# Allegro board dsb-p2.brd
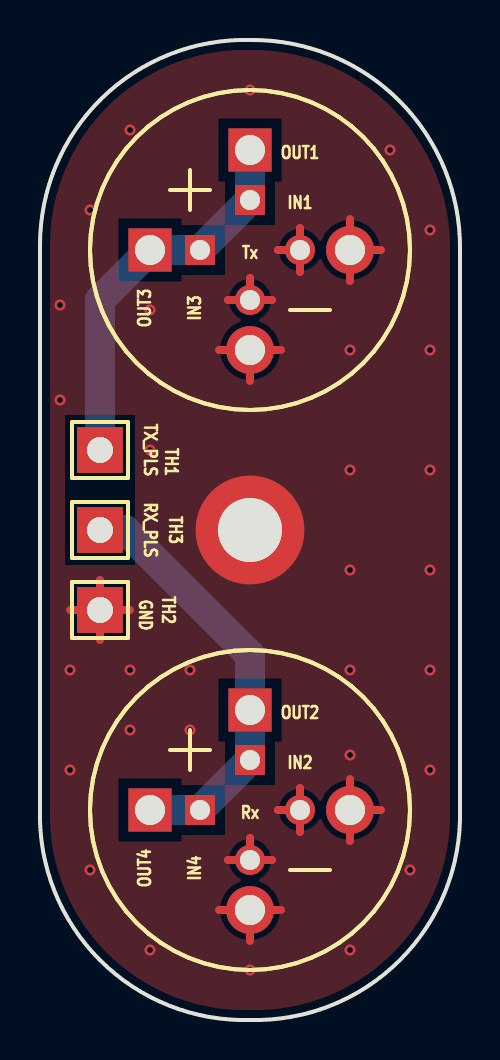
[diagram p0: board, top side]
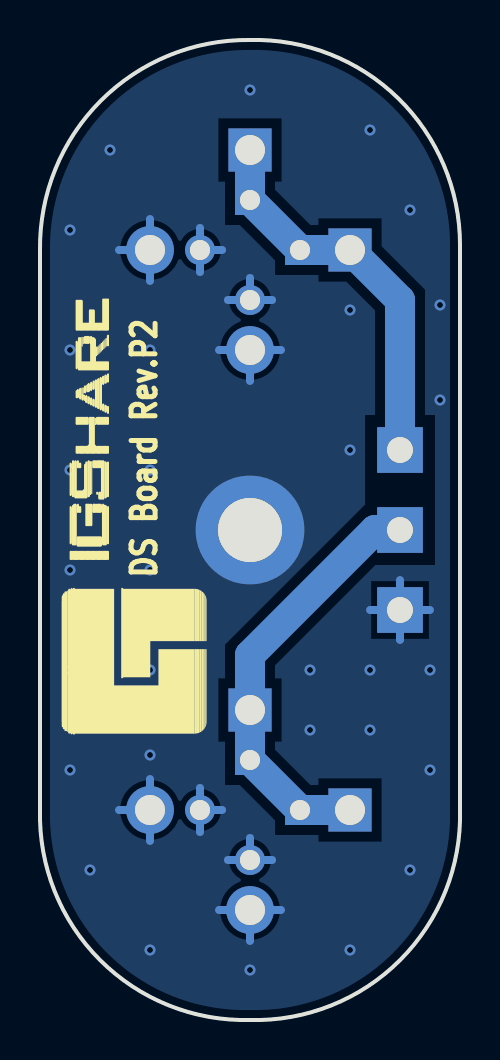
[diagram p1: board, bottom side, seen from below]

Outline 21 x 49 mm; copper layers: TOP, BOTTOM. Coordinates in mm from the lower left corner of the outline.
Outline path: 0,38.75 0,10.5 arc(3,3) 10.5,0 arc(18,3) 21,10.5 21,38.5 arc(17.96,45.96) 10.5,49 arc(3.09,46.09) 0,38.75

## Placement (name value [footprint] x y rotation side)
A  -  []  24.25 32.25 90 bottom
H1  -  [HOLE3_2]  10.5 24.5 0 top
NOREF  -  []  1 1 0 top
NOREF#2  -  []  28 7.5 0 top
NOREF#3  -  []  26.5 30.25 0 top
O1  -  [ZT40_ZR40]  10.5 38.5 270 top
O2  -  [ZT40_ZR40]  10.5 10.5 270 top
O3  -  [ZT40_ZR40]  10.5 38.5 0 top
O4  -  [ZT40_ZR40]  10.5 10.5 0 top
TH1  -  [TP0_9]  3 28.5 0 top
TH2  -  [TP0_9]  3 20.5 0 top
TH3  -  [TP0_9]  3 24.5 0 top
W1  -  [US14_4_01A]  10.5 38.5 270 top
W2  -  [US14_4_01A]  10.5 10.5 270 top
W3  -  [US14_4_01A]  10.5 38.5 0 top
W4  -  [US14_4_01A]  10.5 10.5 0 top

## Library data of the parts
H1 = PCB_HOLE: alternate symbols: (B:HOLE3_2_ALT)
O1 O3 = ZT40: alternate symbols: (B:ZT40_ZR40_ALT)
O2 O4 = ZR40R: alternate symbols: (B:ZT40_ZR40_ALT)
TH1-TH3 = B+: alternate symbols: (B:TP0_9_ALT)
W1-W4 = US14_4_01A: alternate symbols: (B:US14_4_01A_ALT)

## Footprints (pads in the part's own frame, mm; a bottom-side part is the same pattern mirrored in y, then rotated)
HOLE3_2
  round 5.436 hole 3.2: 1(0,0)
TP0_9
  rect 2.286x2.286 hole 1.295: 1(0,0)
US14_4_01A
  rect 1.499x1.499 hole 1: 1(-2.5,0)
  round 1.499 hole 1: 2(2.5,0)
ZT40_ZR40
  rect 2.159x2.159 hole 1.499: 1(-5,0)
  round 2.388 hole 1.5: 2(5,0)

## Nets
GND: H1.1 O1.2 O2.2 O3.2 O4.2 TH2.1 W1.2 W2.2 W3.2 W4.2
RX_PLS: O2.1 O4.1 TH3.1 W2.1 W4.1
TX_PLS: O1.1 O3.1 TH1.1 W1.1 W3.1

## Via types
v1: diameter 0.55, hole 0.3, TOP to BOTTOM, 30 vias

## Routing (per net, layer and track width the routed paths; a pad name or vN(x,y) marks a point on that pad's centre or on a via; arc(x,y) is an arc through that point)
GND: length 75.4
  TOP w0.4: 13,9.4 W4.2 ; W4.2 11.9,10.5 ; W4.2 13,11.6 ; W3.2 13,39.6 ; W3.2 11.9,38.5 ; W3.2 13,37.4 ; TH2.1 3,21.99 ; TH2.1 3,19.01 ; TH2.1 1.51,20.5 ; TH2.1 4.49,20.5 ; 10.5,3.96 O2.2 ; O2.2 12.04,5.5 ; O2.2 8.96,5.5 ; 10.5,31.96 O1.2 ; O1.2 8.96,33.5 ; O1.2 12.04,33.5 ; O4.2 17.04,10.5 ; O4.2 15.5,8.96 ; O4.2 15.5,12.04 ; O3.2 17.04,38.5 ; O3.2 15.5,36.96 ; O3.2 15.5,40.04 ; 9.4,36 W1.2 ; W1.2 10.5,37.1 ; W1.2 11.6,36 ; W2.2 10.5,9.1 ; W2.2 9.4,8 ; W2.2 11.6,8
  BOTTOM w0.4: 15.5,36.96 O3.2 ; O3.2 17.04,38.5 ; O3.2 15.5,40.04 ; 11.9,38.5 W3.2 ; W3.2 13,37.4 ; W3.2 13,39.6 ; 11.9,10.5 W4.2 ; W4.2 13,11.6 ; W4.2 13,9.4 ; O4.2 15.5,12.04 ; O4.2 15.5,8.96 ; O4.2 17.04,10.5 ; TH2.1 3,21.99 ; TH2.1 4.49,20.5 ; TH2.1 1.51,20.5 ; TH2.1 3,19.01 ; W1.2 11.6,36 ; W1.2 9.4,36 ; W1.2 10.5,37.1 ; W2.2 11.6,8 ; W2.2 9.4,8 ; W2.2 10.5,9.1 ; O2.2 12.04,5.5 ; O2.2 10.5,3.96 ; O2.2 8.96,5.5 ; 8.96,33.5 O1.2 ; O1.2 10.5,31.96 ; O1.2 12.04,33.5
  vias: v1(1,35.75) v1(1,31) v1(1.5,17.5) v1(1.5,12.5) v1(2.5,40.5) v1(2.5,7.5) v1(4.5,44.5) v1(4.5,17.5) v1(4.5,14.5) v1(5.5,35.5) v1(5.5,28.5) v1(5.5,3.5) v1(7.5,17.5) v1(7.5,14.5) v1(10.5,46.5) v1(10.5,2.5) v1(15.5,33.5) v1(15.5,27.5) v1(15.5,22.5) v1(15.5,17.5) v1(15.5,13.25) v1(15.5,3.5) v1(17.5,43.5) v1(18.5,7.5) v1(19.5,39.5) v1(19.5,33.5) v1(19.5,27.5) v1(19.5,22.5) v1(19.5,17.5) v1(19.5,12.5)
RX_PLS: length 21.4
  BOTTOM w1.5: O4.1 W4.1 W2.1 O2.1 10.5,18.25 4.25,24.5 TH3.1
TX_PLS: length 19.6
  BOTTOM w1.5: TH1.1 3,36 O3.1 W3.1 W1.1 O1.1

## Copper pours and planes (outline as drawn; the poured copper is in the pictures)
GND on TOP, BOTTOM: 0.5,10.49 0.5,38.75 3.44,45.73 10.5,48.5 17.61,45.61 20.5,38.51 20.5,10.49 20.5,10.49 17.64,3.35 10.5,0.5 3.35,3.34 0.5,10.49 ; 1 cut-out

## Text on the board
Ref Des/Silkscreen Bottom: DS Board Rev.P2
Ref Des/Silkscreen Top: Tx | Rx | OUT1 | IN1 | OUT2 | IN2 | OUT3 | OUT4 | IN3 | IN4 | GND | TX_PLS | RX_PLS
NCLEGEND-1-2: FIGURE | SIZE | 0.30 | 1.00 | 1.30 | 1.50 | 3.20 | DRILL CHART: TOP to BOTTOM | ALL UNITS ARE IN MILLIMETERS | PLATED | QTY | 30 | 8 | 3 | 4 | 1
